# EAGLE board circuit_board (EAGLE 9.7.0)
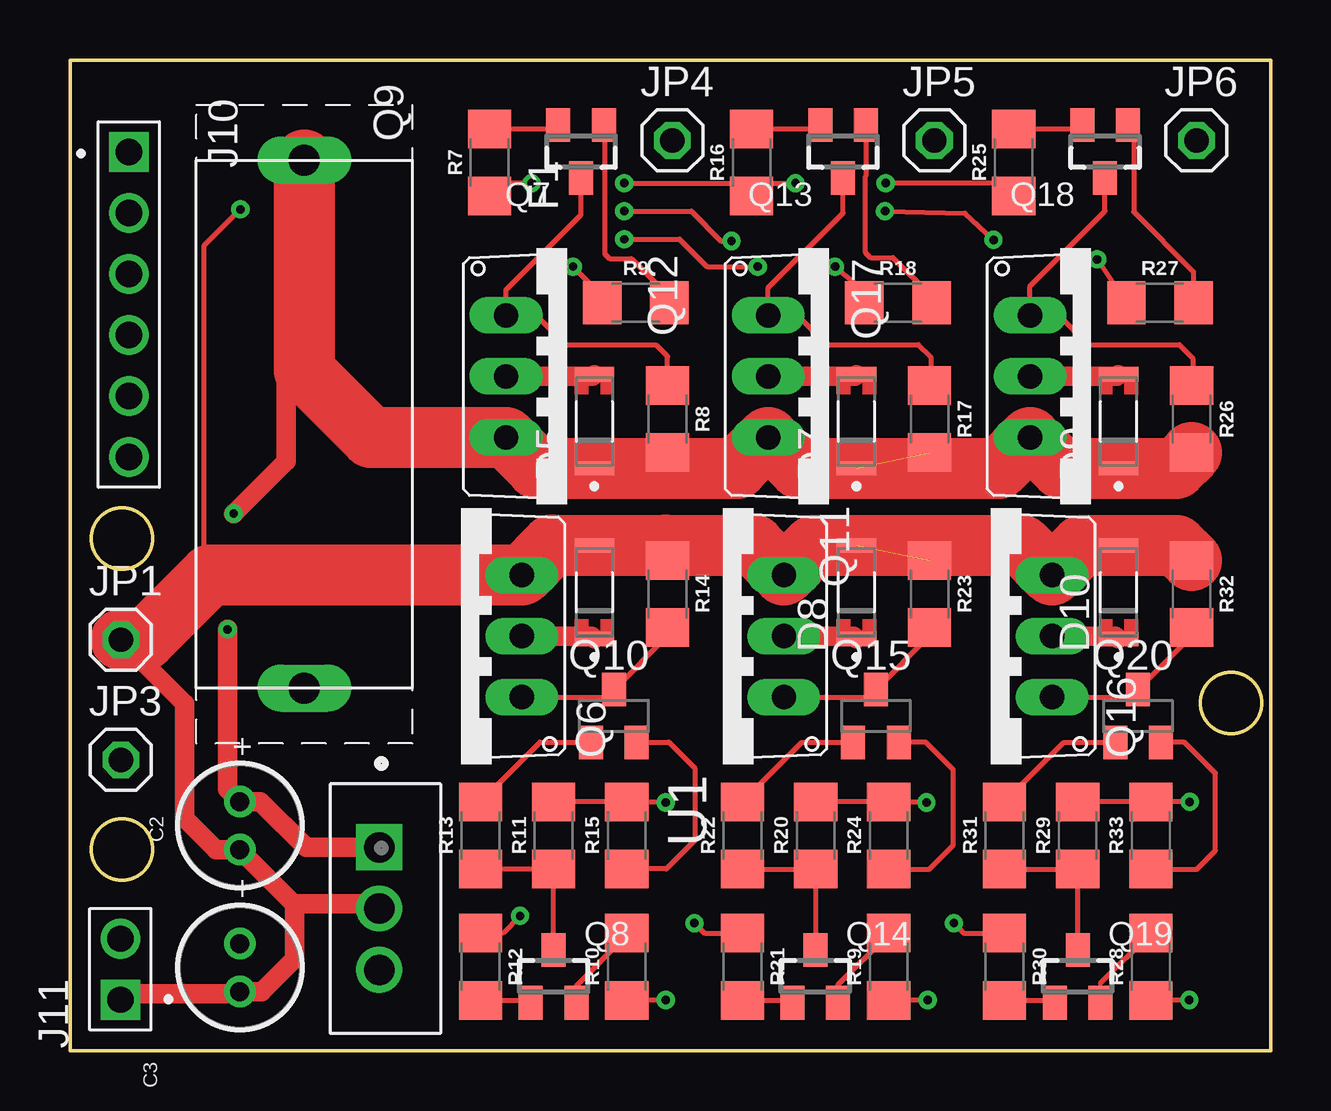
[diagram p0: board, top side]
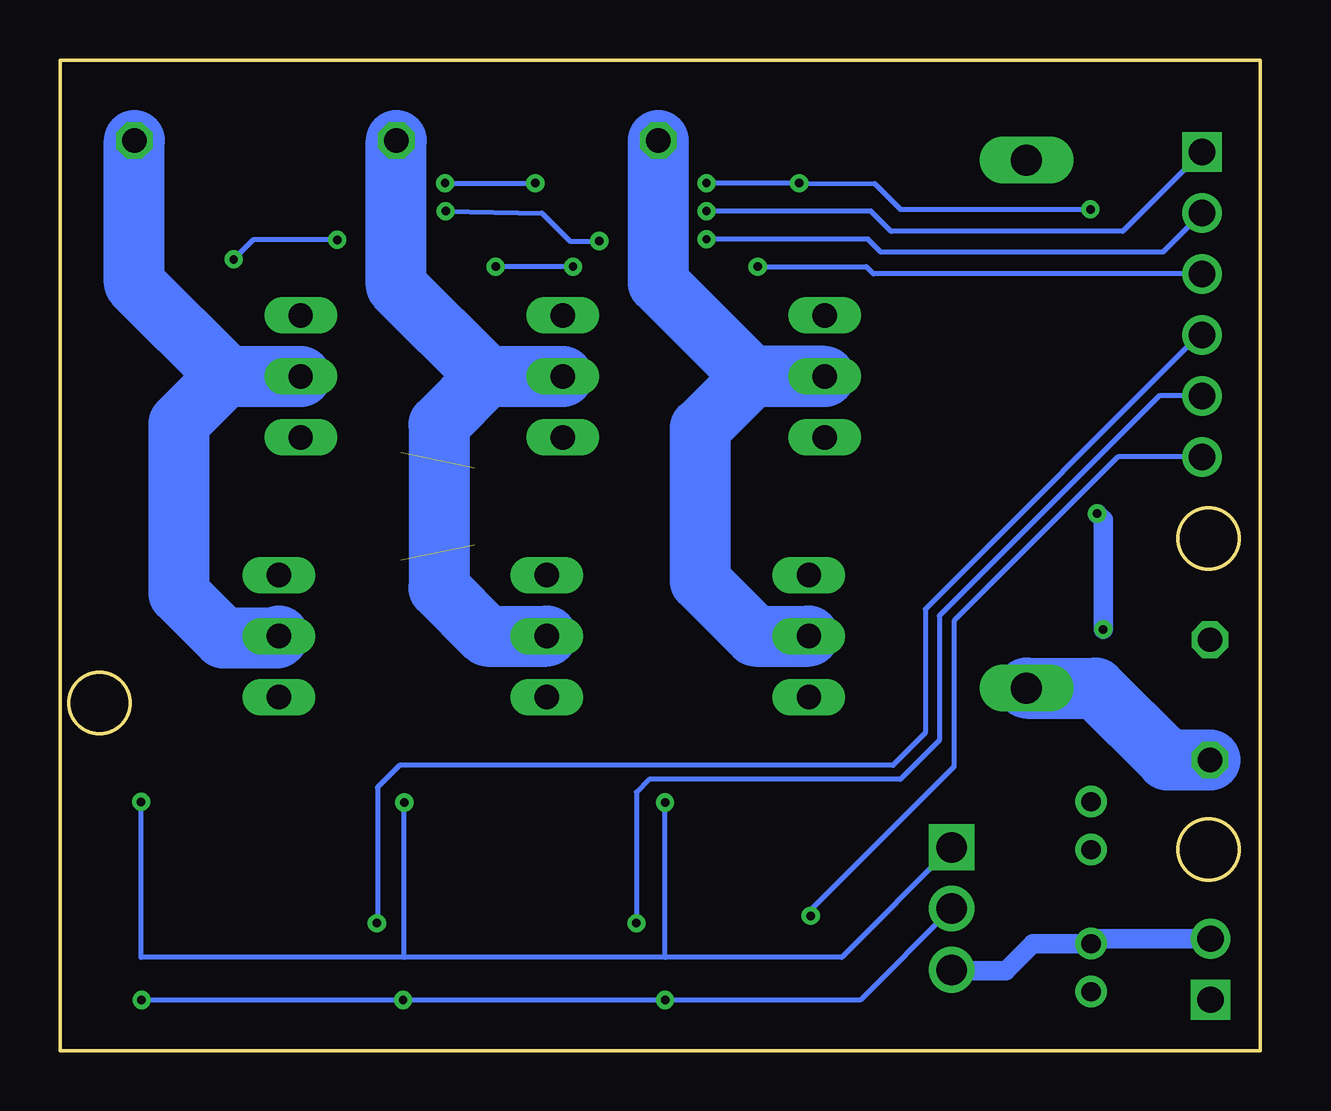
[diagram p1: board, bottom side, seen from below]

Size 50.04 x 41.27 mm. Coordinates in mm from the lower left corner, seen from the top.
Outline: 0,41.27 50.04,41.27 50.04,0 0,0 0,41.27
Outline: circle at 2.16,21.34 radius 1.27
Outline: circle at 2.16,8.38 radius 1.27
Outline: circle at 48.39,14.48 radius 1.27
Copper layers (1*16): Top / Bottom
Stack-up Default Layer Stack: Top User Defined 0.035mm / Dielectric-1 User Defined 1.5mm / Bottom User Defined 0.035mm
Design rules "default *": minimum track width 6mil, minimum drill 0.35mm, track to track 6mil, track to pad 6mil, pad to pad 6mil, via to via 6mil, smd to smd 6mil, copper to edge 1mil, drill to drill 1mil, minimum pad ring 10mil, minimum via ring 8mil, stop-mask expansion 4mil, vias tented up to drill 0mil, thermal gap 10mil

## Footprints (pad centres in the part's own frame; a part is rotated, then mirrored left to right if it is on the bottom)
WCAP-ATET_5X11(DXL) = drill 0.8: 1 1,0; 2 -1,0
DIO_LL4148 = smd 0.6 x 1.65: A 1.95,0; C -1.95,0
MC000827 = drill 1.3 long: P$1 22,-4.5; P$2 0,-4.5
61300611121 = drill 1.1 square: 1 -6.35,0 | drill 1.1: 2 -3.81,0; 3 -1.27,0; 4 1.27,0; 5 3.81,0; 6 6.35,0
61300211121 = drill 1.1 square: 1 -1.27,0 | drill 1.1: 2 1.27,0
1X01 = drill 1.016 octagon: 1 0,0
TO220V = drill 1.016 long: 1 -2.54,-2.54; 2 0,-2.54; 3 2.54,-2.54
SOT23-BEC = smd 1 x 1.4: B -0.95,-1.1; C 0,1.1; E 0.95,-1.1
1206 = smd 1.6 x 1.8: 1 -1.4,0; 2 1.4,0
TO-220-3 = drill 1.27 pad 1.91 square: 1 -2.55,-0.26 | drill 1.27 pad 1.91: 2 0,-0.26; 3 2.55,-0.26

## Placement (x,y rotation side)
C2  47 µF  [WCAP-ATET_5X11(DXL)]  7.06,9.37 90 top
C3  47 µF  [WCAP-ATET_5X11(DXL)]  7.06,3.45 90 top
D5  LL4148  [DIO_LL4148]  21.84,26.21 90 top
D6  LL4148  [DIO_LL4148]  21.84,19.1 90 top
D7  LL4148  [DIO_LL4148]  32.77,26.21 90 top
D8  LL4148  [DIO_LL4148]  32.77,19.1 90 top
D9  LL4148  [DIO_LL4148]  43.69,26.21 90 top
D10  LL4148  [DIO_LL4148]  43.69,19.1 90 top
F1  MC000827  [MC000827]  14.25,37.1 270 top
J10  61300611121  [61300611121]  2.44,31.09 270 top
J11  61300211121  [61300211121]  2.08,3.39 90 top
JP1  [1X01]  2.11,17.12 0 top
JP3  [1X01]  2.11,12.12 0 top
JP4  [1X01]  25.1,37.92 0 top
JP5  [1X01]  36.02,37.92 0 top
JP6  [1X01]  46.94,37.92 0 top
Q6  [TO220V]  16.28,17.27 90 top
Q7  MMBT2222  [SOT23-BEC]  21.29,37.46 180 top
Q8  MMBT2222  [SOT23-BEC]  20.14,3.1 0 top
Q9  MOSFET-PGDS_TO220V  [TO220V]  20.7,28.09 270 top
Q10  MMBT2907SMD  [SOT23-BEC]  22.66,13.94 0 top
Q11  [TO220V]  27.2,17.27 90 top
Q12  MOSFET-PGDS_TO220V  [TO220V]  31.62,28.09 270 top
Q13  MMBT2222  [SOT23-BEC]  32.21,37.46 180 top
Q14  MMBT2222  [SOT23-BEC]  31.05,3.1 0 top
Q15  MMBT2907SMD  [SOT23-BEC]  33.58,13.94 0 top
Q16  [TO220V]  38.38,17.27 90 top
Q17  MOSFET-PGDS_TO220V  [TO220V]  42.55,28.09 270 top
Q18  MMBT2222  [SOT23-BEC]  43.13,37.46 180 top
Q19  MMBT2222  [SOT23-BEC]  41.99,3.1 0 top
Q20  MMBT2907SMD  [SOT23-BEC]  44.5,13.94 0 top
R7  10k  [1206]  17.48,37.01 90 top
R8  47k  [1206]  24.89,26.31 270 top
R9  1k  [1206]  23.57,31.17 0 top
R10  10k  [1206]  23.19,3.5 90 top
R11  47k  [1206]  20.14,8.97 90 top
R12  1k  [1206]  17.09,3.5 270 top
R13  1k  [1206]  17.09,8.97 90 top
R14  10k  [1206]  24.89,19.02 270 top
R15  10k  [1206]  23.19,8.97 90 top
R16  10k  [1206]  28.4,37.01 90 top
R17  47k  [1206]  35.81,26.31 270 top
R18  1k  [1206]  34.49,31.17 0 top
R19  10k  [1206]  34.11,3.5 90 top
R20  47k  [1206]  31.06,8.97 90 top
R21  1k  [1206]  28.02,3.5 270 top
R22  1k  [1206]  28.02,8.97 90 top
R23  10k  [1206]  35.81,19.02 270 top
R24  10k  [1206]  34.11,8.97 90 top
R25  10k  [1206]  39.32,37.01 90 top
R26  47k  [1206]  46.74,26.31 270 top
R27  1k  [1206]  45.42,31.17 0 top
R28  10k  [1206]  45.03,3.5 90 top
R29  47k  [1206]  41.99,8.97 90 top
R30  1k  [1206]  38.94,3.5 270 top
R31  1k  [1206]  38.94,8.97 90 top
R32  10k  [1206]  46.74,19.02 270 top
R33  10k  [1206]  45.03,8.97 90 top
U1  L7812CV  [TO-220-3]  13.13,5.92 270 top

## Library data of the parts
C2 C3 = Wurth_Capacitors_WCAP-ATET; DATASHEET-URL: https://www.we-online.com/catalog/datasheet/860130272001.pdf; DF: 18%; DIAMETER: 5mm; I-LEAK: 4.7uA; I-RIPPLE: 92mA; L: 11mm; OPERATING-TEMPERATURE: -40 °C up to +125 °C; PART-NUMBER: 860130272001; PITCH: 2mm; TECHNICAL-REFERENCE: ATGC110470M010DSPA3A000; VR: 10V(DC)
D5-D10 = LL4148; AVAILABILITY: In Stock; DESCRIPTION: Diode Standard 75 V 200mA Surface Mount LL-34; MF: MDD; MP: LL4148; PACKAGE: None; PRICE: None; PURCHASE-URL: https://pricing.snapeda.com/search/part/LL4148/?ref=eda
F1 = MC000827; AVAILABILITY: In Stock; DESCRIPTION: Fuse Holder, 250 V, 6.3 A, Pcb Fuse Holder, Through Hole, 1; MF: Multicomp; MP: MC000827; PACKAGE: None; PRICE: None
J10 = Headers; CREATED_BY: PCBLayout.com; DIGI_KEY_PART_NUMBER: 732-5319-ND; MANUFACTURER: Wurth Electronics Inc.; MPN: 61300611121
J11 = Headers; CREATED_BY: PCBLayout.com; DIGI_KEY_PART_NUMBER: 732-5315-ND; MANUFACTURER: Wurth Electronics Inc.; MPN: 61300211121
JP1 JP3-JP6 = pinhead
Q6 Q9 Q11 Q12 Q16 Q17 = adafruit
Q7 Q8 Q13 Q14 Q18 Q19 = MMBT2222_; AVAILABILITY: In Stock; DESCRIPTION: Bipolar (BJT) Transistor NPN 30 V 600 mA 250MHz 300 mW Surface Mount SOT-23-3 (TO-236); MF: ON Semiconductor; MP: MMBT2222; PACKAGE: SOT-23-3 Fairchild Semiconductor; PRICE: None; PURCHASE-URL: https://pricing.snapeda.com/search/part/MMBT2222/?ref=eda
Q10 Q15 Q20 = MMBT2907_; AVAILABILITY: In Stock; DESCRIPTION: Bipolar (BJT) Transistor PNP 60 V 600 mA 200MHz 150 mW Surface Mount SC-70-3 (SOT323); MF: ON Semiconductor; MP: MMBT2907; PACKAGE: SOT-23-3 ON Semiconductor; PRICE: None; PURCHASE-URL: https://pricing.snapeda.com/search/part/MMBT2907/?ref=eda
R7-R33 = SparkFun-Resistors
U1 = L7812CV; AVAILABILITY: In Stock; DESCRIPTION: Linear Voltage Regulator IC Positive Fixed 1 Output 1.5A TO-220; MF: STMicroelectronics; MP: L7812CV; PACKAGE: TO-220 STMicroelectronics; PRICE: None; PURCHASE-URL: https://pricing.snapeda.com/search/part/L7812CV/?ref=eda

## Nets
+V: C2.1 D5.C D7.C D9.C F1.P$2 Q9.3 Q12.3 Q17.3 R8.2 R11.2 R15.2 R17.2 R20.2 R24.2 R26.2 R29.2 R33.2 U1.1
BR_A1: J10.3 R9.1
BR_A2: J10.6 R12.1
BR_B1: J10.2 R18.1
BR_B2: J10.5 R21.1
BR_C1: J10.1 R27.1
BR_C2: J10.4 R30.1
GND: C2.2 C3.2 D6.A D8.A D10.A J11.1 JP1.1 Q6.3 Q11.3 Q16.3 R7.1 R10.1 R14.1 R16.1 R19.1 R23.1 R25.1 R28.1 R32.1 U1.2
M_A: D5.A D6.C JP4.1 Q6.2 Q9.2
M_B: D7.A D8.C JP5.1 Q11.2 Q12.2
M_C: D9.A D10.C JP6.1 Q16.2 Q17.2
N$4: Q8.C R11.1 R13.1
N$10: Q8.B R12.2
N$11: Q8.E R10.2
N$12: Q6.1 Q10.C R14.2
N$13: Q10.E R15.1
N$14: Q7.B R9.2
N$15: Q7.C Q9.1 R8.1
N$16: Q7.E R7.2
N$19: Q10.B R13.2
N$20: F1.P$1 JP3.1
N$22: Q14.C R20.1 R22.1
N$23: Q14.B R21.2
N$24: Q14.E R19.2
N$25: Q11.1 Q15.C R23.2
N$26: Q15.E R24.1
N$27: Q13.B R18.2
N$28: Q12.1 Q13.C R17.1
N$29: Q13.E R16.2
N$30: C3.1 J11.2 U1.3
N$32: Q15.B R22.2
N$36: Q19.C R29.1 R31.1
N$37: Q19.B R30.2
N$38: Q19.E R28.2
N$39: Q16.1 Q20.C R32.2
N$40: Q20.E R33.1
N$41: Q18.B R27.2
N$42: Q17.1 Q18.C R26.1
N$43: Q18.E R25.2
N$46: Q20.B R31.2

## Tracks (layer width: path | path; a pad name or v marks a point on that pad's centre or on a via)
+V  (via drill 0.35)  (1 unrouted)
  Top 0.203: v24.82,10.34 23.22,10.34 | R15.2 R11.2 | v46.66,10.36 R33.2 R29.2 | v35.69,10.34 34.14,10.34 R24.2 R20.2
  Top 0.813: 9.75,28.58 8.99,27.82 8.99,24.56 v6.81,22.38 | v6.55,17.55 6.55,10.88 C2.1 7.92,10.37 9.82,8.47 U1.1 | R8.2 24.89,24.31 24.84,24.26 | 23.22,10.34 R15.2
  Top 2.54: F1.P$2 9.75,28.58 9.75,28.32 12.52,25.55 Q9.3 19.45,24.26 D5.C 24.84,24.26 27.79,24.26 Q12.3 30.37,24.26 D7.C 38.72,24.26 Q17.3 41.3,24.26 D9.C 46.08,24.26 R26.2
  Bottom 0.203: U1.1 17.45,3.89 24.82,3.89 | 24.82,3.89 v24.82,10.34 | 24.82,3.89 35.69,3.89 | 35.69,3.89 46.66,3.89 v46.66,10.36 | 35.69,3.89 v35.69,10.34
  Bottom 0.813: v6.81,22.38 6.55,22.12 v6.55,17.55
BR_A1  (via drill 0.35)
  Top 0.203: 22.17,31.75 R9.1 22.17,31.45 v20.95,32.66
  Bottom 0.203: J10.3 16.13,32.36 16.43,32.66 v20.95,32.66
BR_A2  (via drill 0.35)
  Top 0.203: v18.75,5.61 18.03,4.89 R12.1
  Bottom 0.203: v18.75,5.61 18.75,5.87 12.78,11.84 12.78,17.91 5.94,24.74 J10.6
BR_B1  (via drill 0.35)
  Top 0.203: v23.09,33.81 25.4,33.81 26.54,32.66 v28.65,32.66 | v31.88,32.66 33.09,31.65 R18.1
  Bottom 0.203: J10.2 4.06,33.27 15.82,33.27 16.36,33.81 v23.09,33.81 | v28.65,32.66 v31.88,32.66
BR_B2  (via drill 0.35)
  Top 0.203: v26.01,5.31 26.42,4.89 R21.1
  Bottom 0.203: J10.5 4.22,27.28 13.39,18.11 13.39,12.93 15.01,11.3 25.48,11.3 26.01,10.77 v26.01,5.31
BR_C1  (via drill 0.35)
  Top 0.203: v23.09,34.98 25.88,34.98 27.13,33.73 v27.56,33.73 | v33.96,34.98 37.29,34.9 v38.48,33.78 | v42.8,32.97 R27.1
  Bottom 0.203: J10.1 5.74,34.14 15.39,34.14 16.23,34.98 v23.09,34.98 | v27.56,33.73 28.78,33.73 29.95,34.9 v33.96,34.98 | v38.48,33.78 41.99,33.78 v42.8,32.97
BR_C2  (via drill 0.35)
  Top 0.203: v36.83,5.31 37.24,4.89 R30.1
  Bottom 0.203: J10.4 2.54,29.82 13.97,18.39 13.97,13.23 15.32,11.89 35.89,11.89 36.8,10.97 36.8,5.33 v36.83,5.31
GND  (via drill 0.35)  (1 unrouted)
  Top 0.203: v24.82,2.11 24.8,2.1 R10.1 | v7.09,35.05 5.56,33.53 5.56,20.32 6.07,19.81 | v23.09,36.14 28.35,36.14 | 28.35,36.14 v30.23,36.14 | v35.74,2.11 34.12,2.11 R19.1 | v46.63,2.11 46.62,2.1 R28.1 | v33.98,36.14 38.78,36.14 R25.1 | R16.1 28.4,36.09 28.35,36.14 | v19.23,36.14 17.58,36.14 17.53,36.2 17.48,36.14 R7.1
  Top 0.813: J11.1 2.34,2.37 6.73,2.37 6.81,2.45 C3.2 7.97,2.45 9.35,3.83 9.35,6.12 | U1.2 12.67,6.12 9.35,6.12 | 9.35,6.12 9.31,6.12 C2.2 6.08,8.37 4.78,9.68 4.78,14.45 JP1.1 | R14.1 24.89,20.98 24.82,21.06
  Top 2.54: R32.1 46.11,21.05 D10.A 42.16,21.05 Q16.3 39.68,21.05 D8.A 30.98,21.05 Q11.3 28.5,21.06 24.82,21.06 D6.A 20.07,21.06 Q6.3 6.07,19.81 5.82,19.81 3.12,17.12 JP1.1
  Bottom 0.203: U1.2 16.68,2.11 v24.82,2.11 v35.74,2.11 v46.63,2.11 | v7.09,35.05 15.01,35.05 16.08,36.12 v19.23,36.14 v23.09,36.14 | 34.16,36.14 v33.98,36.14 v30.23,36.14
M_A
  Top 0.813: Q9.2 21.77,28.09 D5.A | Q6.2 21.73,17.27 D6.C
  Bottom 2.54: JP4.1 25.09,31.98 21.21,28.09 Q9.2 21.18,28.09 23.34,25.93 23.34,19.56 21.06,17.27 Q6.2
M_B
  Top 0.813: Q11.2 32.65,17.27 D8.C | Q12.2 32.7,28.09 D7.A
  Bottom 2.54: 32.23,28.09 Q12.2 | 32.23,28.09 34.24,26.09 34.24,19.28 32.23,17.27 Q11.2 | 32.23,28.09 36.02,31.88 JP5.1
M_C
  Top 0.813: Q16.2 43.57,17.27 D10.C | Q17.2 43.62,28.09 D9.A
  Bottom 2.54: 43.05,28.09 Q17.2 | 43.05,28.09 43.13,28.09 45.09,26.14 45.09,19.05 43.23,17.2 41,17.2 Q16.2 | JP6.1 46.94,31.98 43.05,28.09
N$4
  Top 0.203: 20.14,4.52 Q8.C R11.1 R13.1
N$10
  Top 0.203: R12.2 19.09,2.1 Q8.B
N$11
  Top 0.203: R10.2 23.11,4.89 23.11,4.72 21.09,2.7 Q8.E
N$12
  Top 0.203: Q6.1 22.34,14.73 Q10.C 24.89,17.29 R14.2
N$13
  Top 0.203: Q10.E 24.95,12.85 26.04,11.76 26.04,8.76 24.84,7.57 R15.1
N$14
  Top 0.203: R9.2 25.09,31.29 23.39,33 22.48,33 22.28,33.2 22.28,38.52 Q7.B | Q7.B 22.28,38.52 | Q7.B
N$15
  Top 0.203: R8.1 24.89,28.93 24.43,29.39 20.65,29.39 19.41,30.63 Q9.1 18.16,31.7 21.29,34.82 Q7.C
N$16
  Top 0.203: R7.2 20.18,38.41 Q7.E
N$19
  Top 0.203: R13.2 19.58,12.85 Q10.B
N$20
  Bottom 2.54: JP3.1 3.89,12.12 6.87,15.1 F1.P$1
N$22
  Top 0.203: R22.1 R20.1 31.06,4.21 Q14.C
N$23
  Top 0.203: R21.2 30,2.1 Q14.B
N$24
  Top 0.203: Q14.E 32,2.74 34.11,4.85 R19.2
N$25
  Top 0.203: Q11.1 33.27,14.73 Q15.C 35.81,17.28 R23.2
N$26
  Top 0.203: R24.1 35.81,7.57 36.8,8.56 36.8,11.71 35.67,12.85 Q15.E
N$27
  Top 0.203: R18.2 35.89,31.44 34.29,33.05 33.35,33.05 33.12,33.27 33.12,36.41 33.16,36.44 Q13.B
N$28
  Top 0.203: R17.1 35.87,27.77 35.87,28.91 35.36,29.41 31.52,29.41 30.3,30.63 Q12.1 29.08,31.77 32.21,34.9 Q13.C
N$29
  Top 0.203: R16.2 31.1,38.41 Q13.E
N$30
  Bottom 0.813: J11.2 6.86,4.66 C3.1 9.49,4.45 10.62,3.33 12.83,3.33 U1.3
N$32
  Top 0.203: R22.2 30.5,12.85 Q15.B
N$36
  Top 0.152: 41.79,7.57 41.99,7.37
  Top 0.203: Q19.C 41.99,7.37 R29.1 | R31.1 41.79,7.57
N$37
  Top 0.152: 40.94,2.1 Q19.B
  Top 0.203: R30.2 40.94,2.1
N$38
  Top 0.152: Q19.E 42.94,2.8
  Top 0.203: 42.94,2.8 R28.2
N$39
  Top 0.203: Q16.1 44.19,14.73 Q20.C 46.74,17.28 R32.2
N$40
  Top 0.203: R33.1 46.96,7.57 47.73,8.33 47.73,11.56 46.44,12.85 Q20.E
N$41
  Top 0.203: Q18.B 44.32,38.32 44.32,34.95 46.81,32.46 R27.2
N$42
  Top 0.203: R26.1 46.79,27.77 46.79,28.85 46.23,29.41 42.42,29.41 41.2,30.63 Q17.1 40.01,31.85 43.13,34.98 Q18.C
N$43
  Top 0.203: R25.2 42.02,38.41 Q18.E
N$46
  Top 0.203: R31.2 41.42,12.85 Q20.B